# Altium PCB ESP-RC-Car.fixed.PcbDoc (part 2 of 2)
Units mm, origin at the board's own origin, x right, y up, seen from the top; angles counter-clockwise.
Board outline 100.25 x 60.25 mm, 4 copper layers (Top Layer, Int1 (Signal), Int2 (GND), Bottom Layer(PWR)), stack 1.586 mm thick; 110 components, 97 nets, 403 pads, 571 vias.
Unrouted connection lines stored in the file: 3.
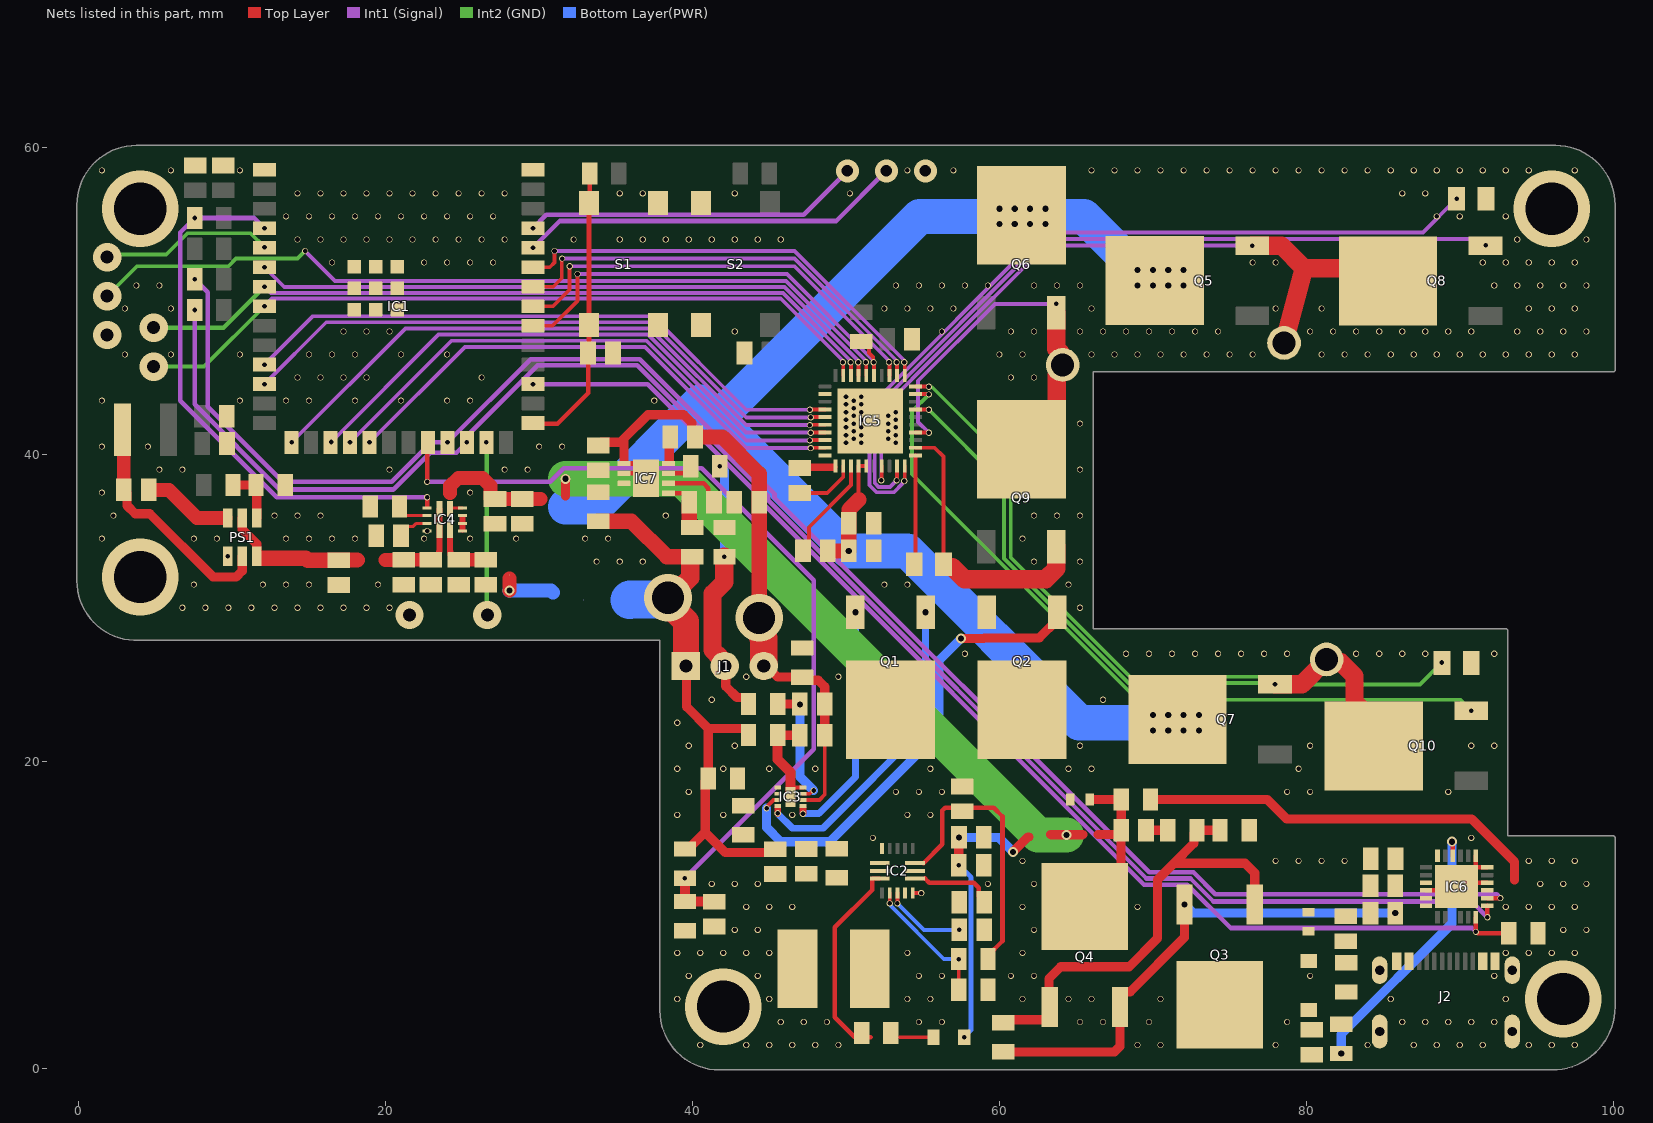
[diagram p4: the nets of this part, all layers, seen from the top]

## Via types
v1: diameter 0.4, hole 0.3, Top Layer to Bottom Layer(PWR), tented both sides, 500 vias
v2: diameter 0.65, hole 0.4, Top Layer to Bottom Layer(PWR), tented both sides, 49 vias
v3: diameter 1.85, hole 0.85, Top Layer to Bottom Layer(PWR), 9 vias
v4: diameter 5, hole 3.4, Top Layer to Bottom Layer(PWR), 5 vias
v5: diameter 1.5, hole 0.75, Top Layer to Bottom Layer(PWR), 4 vias
v6: diameter 3.1, hole 2.1, Top Layer to Bottom Layer(PWR), 2 vias
v7: diameter 0.65, hole 0.4, Top Layer to Bottom Layer(PWR), 1 vias
v8: diameter 0.4/0.4/0.4/0.4 (per signal layer), hole 0.3, Top Layer to Bottom Layer(PWR), tented both sides, 1 vias

## Nets (pads, with @x,y where several pads share a name; then routed paths per layer and width w, separated by ;. In a path a pad name is that pad's centre, name@x,y a point inside that pad or via, vN(x,y) a via of type N, cw(c..) or ccw(c..) an arc to the next point about the centre after c; other vN are vias at no path point) (continued)
GND: C1.2 C2.2 C3.1 C4.1 C6.1 C7.1 C8.1 C9.1 C10.2 C12.1 C13.1 C15.1 C16.1 C18.2 C20.2 C21.2 C22.1 C23.2 C24.2 C25.2 C26.2 C27.2 C28.2 C29.1 C30.1 C33.1 C34.1 C35.1 C36.1 D2.2 D3.2 IC1.1 IC1.40 IC1.41 IC1.42 IC1.43 IC1.44 IC1.45 IC1.46 IC1.47 IC1.48 IC1.49 IC2.8 IC2.16 IC4.3 IC4.4 IC4.5 IC4.12 IC5.10 IC5.11 IC5.20 IC5.32 IC5.40 IC5.41 IC6.10 IC6.12 IC6.13 IC6.22 IC6.25 J2.A1_B12 J2.B1_A12 J2.SH1 J2.SH2 J2.SH3 J2.SH4 PS1.1 Q2.3 R4.1 R5.1 R16.1 R24.1 R26.1 R27.1 R28.1 R29.1 R38.1 S1.2 S1.4 S2.1 S2.3 | length 113.1
  Top Layer w0.25: v1(53.8,38.259) 53.825,38.284 IC5.10@53.825,39.225 ; IC2.16@54.35,11.4 v1(54.9,11.4) ; R28.1@54.45,32.825 54.525,32.9 IC5.11@54.525,39.925 ; IC5.20@54.525,44.425 55.375,44.425 v1(55.4,44.4)
  Top Layer w0.3: IC6.22@87.8,11.575 89.55,11.575 IC6.25@89.8,11.825 ; IC6.25@90.05,12.075 IC6.10@91.8,12.075 ; IC6.13@91.05,13.825 91.05,13.075 IC6.12@91.8,13.075
  Top Layer w0.4: 25,35.1 IC4.4@25,35.5 IC4.5@25,35.9
  Int1 (Signal) w0.25: v1(53.8,38.259) 53.725,38.184 53.725,38.124 53.121,37.52 51.984,37.52 51.525,37.979 51.525,43.101 62.874,54.45 87.6,54.45 v1(89.8,56.65)
  Int2 (GND) w0.25: v1(55.4,44.4) 55.429,44.371 55.62,44.371 60.737,39.254 60.737,33.265 68.502,25.5 79.3,25.5 79.8,25 87.4,25 v1(88.825,26.425)
  other v1: 40.5,1.5 43.5,1.5 45,1.5 46.5,1.5 48,1.5 49.5,1.5 69,1.5 70.5,1.5 78,1.5 84,1.5 87,1.5 88.5,1.5 90,1.5 91.5,1.5 94.5,1.5 96,1.5 97.5,1.5 45.75,3 47.25,3 48.75,3 54.75,3 56.25,3 65.25,3 66.75,3 69.75,3 78.75,3 86.25,3 87.75,3 89.25,3 90.75,3 92.25,3 39,4.5 45,4.5 54,4.5 55.5,4.5 61.5,4.5 64.5,4.5 66,4.5 70.5,4.5 85.5,4.5 93,4.5 39.75,6 44.25,6 54.75,6 56.25,6 60.75,6 62.25,6 80.25,6 92.25,6 39,7.5 40.5,7.5 42,7.5 43.5,7.5 45,7.5 54,7.5 61.5,7.5 93,7.5 94.5,7.5 96,7.5 97.5,7.5 42.75,9 44.25,9 62.25,9 96.75,9 98.25,9 43.5,10.5 45,10.5 46.5,10.5 61.5,10.5 69,10.5 93,10.5 94.5,10.5 96,10.5 97.5,10.5 41.25,12 42.75,12 44.25,12 59.25,12 62.25,12 95.25,12 96.75,12 98.25,12 61.5,13.5 78,13.5 79.5,13.5 81,13.5 82.5,13.5 94.5,13.5 96,13.5 97.5,13.5 51.75,15 90.75,15 39,16.5 42,16.5 46.5,16.5 54,16.5 55.5,16.5 39.75,18 53.25,18 54.75,18 56.25,18 78.75,18 80.25,18 89.25,18 39,19.5 42,19.5 45,19.5 48,19.5 55.5,19.5 64.5,19.5 66,19.5 79.5,19.5 39.75,21 42.75,21 65.25,21 80.25,21 90.75,21 92.25,21 39,22.5 41.25,24 66.75,24 43.5,25.5 49.5,25.5 57.75,27 68.25,27 69.75,27 71.25,27 72.75,27 74.25,27 75.75,27 77.25,27 78.75,27 83.25,27 84.75,27 86.25,27 87.75,27 92.25,27 6.75,30 8.25,30 9.75,30 11.25,30 12.75,30 14.25,30 15.75,30 17.25,30 18.75,30 20.25,30 65.25,30 7.5,31.5 12,31.5 13.5,31.5 15,31.5 19.5,31.5 52.5,31.5 54,31.5 64.5,31.5 33.75,33 35.25,33 36.75,33 62.25,33 65.25,33 9.7,33.35 1.5,34.5 7.5,34.5 9,34.5 13.5,34.5 15,34.5 16.5,34.5 18,34.5 22.5,34.5 25.5,34.5 28.5,34.5 33,34.5 34.5,34.5 61.5,34.5 22.7,35 2.25,36 12.75,36 14.25,36 15.75,36 38.25,36 62.25,36 63.75,36 65.25,36 1.5,37.5 25.5,37.5 5.25,39 6.75,39 20.25,39 27.75,39 29.25,39 65.25,39 1.5,40.5 4.5,40.5 30,40.5 31.5,40.5 50,40.75 51,40.75 53.25,40.75 50.5,41 52.75,41 50,41.25 51,41.25 53.25,41.25 50.5,41.5 52.75,41.5 50,41.75 51,41.75 53.25,41.75 50.5,42 52.75,42 65.25,42 50,42.25 51,42.25 53.25,42.25 50.5,42.5 52.75,42.5 50,42.75 51,42.75 53.25,42.75 50.5,43 50,43.25 51,43.25 1.5,43.5 10.5,43.5 13.5,43.5 15,43.5 18,43.5 21,43.5 24,43.5 25.5,43.5 37.5,43.5 50.5,43.5 50,43.75 51,43.75 14.25,45 15.75,45 17.25,45 18.75,45 26.25,45 60.75,45 62.25,45 3,46.5 6,46.5 10.5,46.5 15,46.5 16.5,46.5 18,46.5 21,46.5 24,46.5 60,46.5 61.5,46.5 66,46.5 67.5,46.5 69,46.5 70.5,46.5 72,46.5 73.5,46.5 75,46.5 76.5,46.5 81,46.5 82.5,46.5 84,46.5 85.5,46.5 87,46.5 88.5,46.5 90,46.5 91.5,46.5 93,46.5 94.5,46.5 96,46.5 97.5,46.5 17.25,48 18.75,48 20.25,48 42.75,48 56.25,48 60.75,48 62.25,48 65.25,48 66.75,48 68.25,48 69.75,48 71.25,48 72.75,48 74.25,48 80.25,48 81.75,48 83.25,48 84.75,48 86.25,48 87.75,48 89.25,48 90.75,48 93.75,48 95.25,48 96.75,48 98.25,48 3,49.5 6,49.5 52.5,49.5 54,49.5 55.5,49.5 57,49.5 66,49.5 78,49.5 81,49.5 94.5,49.5 96,49.5 97.5,49.5 3.75,51 5.25,51 53.25,51 54.75,51 56.25,51 57.75,51 59.25,51 62.25,51 63.75,51 65.25,51 92.25,51 93.75,51 95.25,51 96.75,51 98.25,51 16.5,52.5 22.5,52.5 24,52.5 25.5,52.5 27,52.5 76.5,52.5 78,52.5 91.5,52.5 93,52.5 94.5,52.5 96,52.5 97.5,52.5 14.25,54 15.75,54 17.25,54 18.75,54 20.25,54 21.75,54 23.25,54 24.75,54 26.25,54 27.75,54 32.25,54 35.25,54 36.75,54 38.25,54 39.75,54 41.25,54 42.75,54 44.25,54 45.75,54 93.75,54 98.25,54 13.5,55.5 15,55.5 16.5,55.5 18,55.5 19.5,55.5 21,55.5 22.5,55.5 24,55.5 25.5,55.5 27,55.5 88.5,55.5 90,55.5 93,55.5 14.25,57 15.75,57 17.25,57 18.75,57 20.25,57 21.75,57 23.25,57 24.75,57 26.25,57 27.75,57 35.25,57 36.75,57 42.75,57 50.25,57 86.25,57 87.75,57 1.5,58.5 6,58.5 10.5,58.5 54,58.5 57,58.5 66,58.5 67.5,58.5 69,58.5 70.5,58.5 72,58.5 73.5,58.5 75,58.5 76.5,58.5 78,58.5 79.5,58.5 81,58.5 82.5,58.5 84,58.5 85.5,58.5 87,58.5 88.5,58.5 90,58.5 91.5,58.5 93,58.5 94.5,58.5 97.5,58.5
  other v3: 21.55,29.525 1.85,47.77
  other v4: 42,4 96.75,4.5 4,32 4,56 96,56
  other v5: 55.168,58.47
INHA: IC1.11 IC5.34 | length 40.4
  Top Layer w0.25: v1(47.65,42.9) 47.675,42.925 IC5.34@48.625,42.925
  Int1 (Signal) w0.25: v1(12.1,45.84) 15.26,49 37.4,49 43.5,42.9 v1(47.65,42.9)
INHB: IC1.15 IC5.36 | length 40.5
  Top Layer w0.25: v1(47.65,41.9) 47.675,41.925 IC5.36@48.625,41.925
  Int1 (Signal) w0.25: v1(13.865,40.78) 21.285,48.2 37.2,48.2 43.5,41.9 v1(47.65,41.9)
INHC: IC1.18 IC5.38 | length 36.4
  Top Layer w0.25: v1(47.65,40.903) 47.672,40.925 IC5.38@48.625,40.925
  Int1 (Signal) w0.25: v1(17.675,40.78) 24.295,47.4 37,47.4 43.5,40.9 47.647,40.9 v1(47.65,40.903)
INLA: IC1.12 IC5.35 | length 40.8
  Top Layer w0.25: v1(47.7,42.4) 47.725,42.425 IC5.35@48.625,42.425
  Int1 (Signal) w0.25: v1(12.1,44.57) 16.13,48.6 37.295,48.6 43.495,42.4 v1(47.7,42.4)
INLB: IC1.17 IC5.37 | length 37.7
  Top Layer w0.25: v1@47.7,41.425 IC5.37@48.625,41.425
  Int1 (Signal) w0.25: v1(16.449,40.8) 23.449,47.8 37.1,47.8 43.475,41.425 47.675,41.425 v1(47.7,41.4)
INLC: IC1.19 IC5.39 | length 35
  Top Layer w0.25: v1@47.7,40.425 IC5.39@48.625,40.425
  Int1 (Signal) w0.25: v1(18.945,40.78) 25.165,47 36.9,47 43.5,40.4 v1(47.7,40.4)
IO0: C6.2 IC1.27 R2.2 S1.1 S1.3 | length 18.8
  Top Layer w0.3: IC1.27@29.6,42.03 29.63,42 31.2,42 33.19,43.99 C6.2@33.19,46.6 33.25,46.66 S1.1@33.25,48.425 S1.3@33.25,56.375 33.3,56.425 R2.2@33.3,58.3
MISO_DRV: IC1.5 IC5.26 | length 65.9
  Top Layer w0.25: IC5.26@51.325,45.125 v1@51.325,46
  Int1 (Signal) w0.25: v1(14.75,53.25) 16.7,51.3 46.101,51.3 51.271,46.13 51.271,46.029 v1(51.3,46)
  Int2 (GND) w0.25: v3(1.85,50.31) 3.79,52.25 9.75,52.25 10.25,52.75 14.25,52.75 v1(14.75,53.25) ; v3(1.85,52.85) 2.025,53.025 5.7,53.025 7.075,54.4 11.2,54.4 v1(12.1,53.5)
MOSI_DRV: IC1.6 IC5.27 | length 42.2
  Top Layer w0.25: IC5.27@50.825,45.125 v1@50.825,46
  Int1 (Signal) w0.25: v1(12.1,52.19) 13.39,50.9 46.001,50.9 50.725,46.176 50.725,46.116 50.8,46.041 v1(50.8,46)
NetC5_1: C5.1 PS1.6 | length 5.8
  Top Layer w0.9: C5.1@4.55,37.7 4.577,37.673 5.877,37.673 7.7,35.85 PS1.6@9.55,35.85
NetC5_2: C5.2 L1.2 PS1.2 | length 15.7
  Top Layer w0.6: C5.2@2.89,37.74 3.14,37.49 3.14,36.66 3.675,36.125 4.625,36.125 8.75,32 10.25,32 10.65,32.4 PS1.2@10.65,33.35
  Top Layer w0.9: L1.2@2.85,41.6 2.93,41.52 C5.2@2.93,37.7
NetC7_2: C7.2 IC2.14 | length 5.4
  Top Layer w0.25: v1(53.35,10.725) IC2.14@53.35,11.4
  Bottom Layer(PWR) w0.25: v1(53.35,10.725) 55.075,9 v1(57.39,9)
NetC9_2: C9.2 IC2.3 R3.2 | length 18.6
  Top Layer w0.25: IC2.3@54.5,13.35 IC2.3@55.05,13.35
  Top Layer w0.3: IC2.3@55.05,13.35 56.283,14.583 56.283,16.782 56.458,16.958 57.342,16.958 C9.2@57.575,16.725 57.808,16.958 59.633,16.958 60.2,16.39 60.2,8.275 59.25,7.325 R3.2@59.25,7.1
NetC11_1: C11.1 IC2.1 | length 4.8
  Top Layer w0.3: IC2.1@55.15,12.35 55.435,12.065 58.335,12.065 58.64,11.76 58.64,11.16 C11.1@59,10.8
NetC11_2: C11.2 IC2.15 L2.2 | length 1.1
  Top Layer w0.25: L2.2@51.6,7.575 L2.2@51.6,8.675
NetC12_2: C12.2 C13.2 IC2.2 LED1.2 R30.2 | length 18.3
  Top Layer w0.6: v1(57.355,13.225) C13.2@57.355,14.415 ; v2(60.886,14.086) 61.863,15.062 61.912,15.062
  Bottom Layer(PWR) w0.3: v1(57.355,13.225) 58.15,12.43 58.15,2.477 57.7,2.027 v8(57.7,2)
  Bottom Layer(PWR) w0.6: v2(57.365,15.025) 59.948,15.025 v2(60.886,14.086)
NetC14_2: C14.2 IC3.8 IC3.9 R10.1 | length 6.7
  Top Layer w0.25: 46.375,18.475 46.575,18.275 IC3.8@47.2,18.275
  Top Layer w0.65: IC3.9@46.375,17.675 46.375,18.475 46.375,19.275 45.55,20.1 R10.1@45.55,21.7 45.562,21.688 46.977,21.688 C14.2@46.99,21.675
NetC17_2: C17.2 IC3.7 R13.1 | length 8.2
  Top Layer w0.25: IC3.7@47.2,17.875 47.633,17.875 47.846,18.088 v1(47.887,18.088)
  Top Layer w0.6: R13.1@45.55,23.725 C17.2@46.99,23.725
  Bottom Layer(PWR) w0.6: v2(47,23.7) 47,18.975 v1(47.887,18.088)
NetC19_1: C19.1 D3.1 Q4.2 R20.2 R33.2 | length 11.5
  Top Layer w0.6: Q4.2@65.563,10.525 67.93,12.892 C19.1@67.93,15.5 ; D3.1@66.075,17.5 R20.2@67.95,17.5 67.94,17.49 67.94,15.51 C19.1@67.93,15.5 ; R33.2@66.425,15.225 67.72,15.225 67.93,15.435 C19.1@67.93,15.5
NetC19_2: C19.2 R21.1 | length 1.4
  Top Layer w0.6: C19.2@69.55,15.5 R21.1@70.975,15.5
NetC20_1: C20.1 C21.1 IC4.6 IC4.7 R32.1 | length 8.4
  Top Layer w0.2: IC4.7@24.2,36.425 24.2,36.5 IC4.6@25,36.5
  Top Layer w0.9: 24.2,37.455 24.2,37.923 24.727,38.45 26.313,38.45 26.84,37.923 26.84,37.145 26.9,37.085 C21.1@27.125,37.085 ; C21.1@27.21,37.085 C20.1@28.9,37.085 30.09,37.085 30.1,37.075
NetC22_2: C22.2 IC6.24 Q3.3 Q4.3 R19.2 | length 32.2
  Top Layer w0.6: R19.2@60.25,1.05 67.499,1.05 67.85,1.401 Q4.3@67.85,3.975 ; Q4.3@67.85,4.745 68.08,4.975 68.525,4.975 72.064,8.514 v2(72.064,10.66)
  Bottom Layer(PWR) w0.6: v2(72.064,10.66) 72.078,10.66 72.638,10.1 v2(85.8,10.1)
NetC23_1: C23.1 C24.1 IC4.1 IC4.8 R34.2 | length 6.4
  Top Layer w0.4: C24.1@23.175,33.12 23.485,33.43 23.485,33.646 23.503,33.664 23.503,34.747 23.5,34.75 IC4.1@23.5,35.072 ; IC4.1@23.5,35.075 IC4.8@23.5,36.425
  Top Layer w0.9: 19.975,33.1 21.155,33.1 C23.1@21.175,33.12 C24.1@22.95,33.12
NetC25_1: C25.1 D1.1 R18.1 R22.2
NetC26_1: C26.1 IC6.23
NetC27_1: C27.1 C28.1 IC4.2 R35.2 | length 4.1
  Top Layer w0.4: IC4.2@24.2,35.075 24.2,33.67 24.215,33.655 24.215,33.43 24.525,33.12 24.725,33.12 C27.1@24.75,33.12
  Top Layer w0.9: C27.1@24.75,33.12 26.5,33.12 C28.1@26.505,33.125
NetC29_2: C29.2 IC6.21
NetC30_2: C30.2 IC4.11 | length 2.1
  Top Layer w0.2: C30.2@21,34.7 21,34.89 21.41,35.3 21.8,35.3 22,35.5 IC4.11@22.7,35.5
NetC31_1: C31.1 IC5.2 | length 4
  Top Layer w0.25: C31.1@47,37.48 48.78,37.48 49.825,38.525 IC5.2@49.825,39.225
NetC31_2: C31.2 IC5.1 | length 2.2
  Top Layer w0.5: C31.2@47,39.1 47.062,39.162 IC5.1@49.2,39.162
NetC32_2: C32.2 IC5.3 | length 6.8
  Top Layer w0.25: C32.2@47.2,33.7 47.585,34.085 47.585,35.247 50.325,37.987 IC5.3@50.325,39.225
NetC36_2: C36.2 IC1.22 R37.1 R38.2 | length 57.5
  Top Layer w0.3: v1@22.7,38.227 22.7,40.725 IC1.22@22.755,40.78
  Top Layer w0.65: v1(39.5,12.375) R38.2@39.5,10.85 39.502,10.848 41.397,10.848 C36.2@41.4,10.845
  Int1 (Signal) w0.3: v1(22.7,38.2) 30.712,38.2 31.612,39.1 40.6,39.1 47.9,31.8 47.9,20.775 v1(39.5,12.375)
NetC37_1: C37.1 C38.2 IC7.2 R41.1 | length 3.8
  Top Layer w0.3: IC7.2@38.425,38.1 40.725,38.1 41.035,37.79 41.035,37.235 C37.1@41.395,36.875
NetC37_2: C37.2 IC7.1 R39.1 | length 3.6
  Top Layer w0.3: IC7.1@38.425,37.45 39.415,37.45 39.775,37.09 C37.2@39.775,36.875
  Top Layer w1: C37.2@39.775,36.875 39.785,36.865 39.785,35.225 R39.1@39.975,35.225
NetC39_2: C39.2 IC7.4 | length 1.6
  Top Layer w0.6: IC7.4@38.483,39.525 38.483,41.068 C39.2@38.54,41.125
NetC40_2: C40.2 IC7.7 R40.2
NetIC2_10: IC2.10 L2.1 R6.1
NetIC2_11: IC2.11 R8.1 | length 13.4
  Top Layer w0.25: IC2.11@51.725,12.35 IC2.11@52.2,12.35
  Top Layer w0.3: 51.6,2 50.575,2 49.275,3.3 49.275,9.175 51.7,11.6 51.7,12.174 IC2.11@51.7,12.325
NetIC2_13: IC2.13 R3.1 R4.2 | length 8.7
  Top Layer w0.25: v1(52.85,10.725) IC2.13@52.85,11.4 ; R4.2@57.35,5.1 v1(57.35,7.1)
  Bottom Layer(PWR) w0.25: v1(52.85,10.725) 52.85,10.684 52.925,10.609 52.925,10.549 56.374,7.1 v1(57.35,7.1)
NetIC3_1: IC3.1 R12.1
NetIC3_2: IC3.2 R16.2
NetIC3_3: IC3.3 Q2.1 | length 30.8
  Top Layer w0.25: v1(44.825,16.925) 44.854,16.954 44.854,17.047 45.282,17.475 IC3.3@45.55,17.475
  Top Layer w0.6: v2(57.486,27.986) 58.966,27.986 59.011,28.032 62.597,28.032 63.765,29.2 Q2.1@63.765,29.7
  Bottom Layer(PWR) w0.6: v1(44.825,16.925) 44.825,15.675 45.75,14.75 48.95,14.75 56.05,21.85 56.05,26.55 v2(57.486,27.986)
NetIC3_4: IC3.4 Q1.1 | length 20.5
  Top Layer w0.45: v1(45.55,16.6) 45.55,16.95
  Bottom Layer(PWR) w0.45: v1(45.55,16.6) 46.525,15.625 48.5,15.625 55.19,22.315 v2(55.19,29.7)
NetIC3_5: IC3.5 Q1.3 R17.1 | length 15.5
  Top Layer w0.45: v1(47.2,16.575) 47.2,16.95
  Bottom Layer(PWR) w0.45: v1(47.2,16.575) 48.225,16.575 50.61,18.96 v2(50.61,29.7)
NetIC4_10: IC4.10 R24.2 | length 2.2
  Top Layer w0.2: R24.2@20.9,36.6 20.9,36.4 21.3,36 IC4.10@22.7,36
NetIC6_9: IC6.9 R20.1 | length 26.6
  Top Layer w0.6: R20.1@69.85,17.5 77.45,17.5 78.725,16.225 90.775,16.225 93.575,13.425 93.575,12.252
NetIC6_16: IC6.16 R23.1 | length 17.7
  Top Layer w0.3: v2(89.5,14.75) 89.55,14.7 IC6.16@89.55,13.825
  Bottom Layer(PWR) w0.6: v7(82.275,0.95) 82.275,2.197 89.5,9.422 v2(89.5,14.75)
NetIC6_18: IC6.18 R22.1
NetIC7_3: IC7.3 R42.1 | length 1.7
  Top Layer w0.3: IC7.3@38.425,38.75 39.525,38.75 39.875,39.1 R42.1@39.875,39.225
NetLED1_1: LED1.1 R8.2 | length 2.2
  Top Layer w0.25: 53.5,2 LED1.1@55.7,2
NetPS1_4: PS1.4 R1.1 R5.2 | length 3.7
  Top Layer w0.6: R1.1@10.05,38 R5.2@11.55,38 11.6,37.95 PS1.4@11.6,35.85
NetQ1_2: Q1.2 Q2.2
NetQ3_1: Q3.1 Q4.1 R19.1 R21.2 R23.2 | length 31
  Top Layer w0.6: R19.1@60.25,2.95 60.45,3.15 63.048,3.15 63.278,3.38 Q4.1@63.278,3.975 63.224,4.029 63.224,5.824 64,6.6 68.45,6.6 70.3,8.45 70.3,12.275 71.375,13.35 ; R23.2@74.375,15.5 73.1,15.5 R21.2@72.875,15.5 72.675,15.3 72.675,14.65 71.375,13.35 ; Q3.1@76.636,10.66 76.636,12.714 76,13.35 71.375,13.35
NFAULT: IC1.32 IC5.25 R25.1 | length 29.7
  Top Layer w0.25: IC1.32@29.6,48.38 30.88,48.38 32.5,50 v1(32.5,51.75) ; R25.1@51,47.35 51.125,47.35 51.5,46.975 51.5,46.6 51.771,46.329 51.771,46.029 v1(51.8,46) ; IC5.25@51.825,45.125 v1@51.825,46
  Int1 (Signal) w0.25: v1(32.5,51.75) 46.151,51.75 51.771,46.13 51.771,46.029 v1(51.8,46)
PWM_Servo: IC1.25 | length 11.3
  Int2 (GND) w0.3: v1(26.565,40.78) 26.584,40.761 26.584,29.571 v3(26.63,29.525)
RESET: IC1.29 IC6.6 R26.2 | length 79.5
  Top Layer w0.3: IC6.6@91.05,9.825 v1(91.05,8.875) 91.077,8.875 91.177,8.775 R26.2@93.2,8.775
  Int1 (Signal) w0.3: v1(29.6,44.57) 37.066,44.57 44.541,37.096 44.541,36.829 69.42,11.95 72.25,11.95 75.075,9.125 90.8,9.125 v1(91.05,8.875)
RXD: IC1.36 | length 25.1
  Int1 (Signal) w0.3: v1(29.6,53.46) 31.34,55.2 49.358,55.2 v5(52.628,58.47)
SCL: IC1.24 IC6.7 R9.2 | length 112.1
  Top Layer w0.3: v1(91.8,9.825) IC6.7@91.8,10.575
  Int1 (Signal) w0.3: v1(7.55,49.4) 7.55,43.25 13.1,37.7 20.5,37.7 22.9,40.1 24.615,40.1 25.314,40.799 25.314,41.214 29.9,45.8 36.402,45.8 44.941,37.261 44.941,36.995 69.585,12.35 72.45,12.35 73.95,10.85 90.775,10.85 v1(91.8,9.825)
  other v1: 25.295,40.78
SCLK: IC1.7 IC5.28 | length 49.5
  Top Layer w0.25: IC5.28@50.325,45.125 v1@50.325,46
  Int1 (Signal) w0.25: v1(12.1,50.92) 12.52,50.5 45.901,50.5 50.271,46.13 50.271,46.029 v1(50.3,46)
  Int2 (GND) w0.3: v3(4.875,48.25) 9.43,48.25 v1(12.1,50.92)
SDA: IC1.23 IC6.8 R11.2 | length 113.8
  Top Layer w0.3: IC6.8@91.8,11.075 v1(92.65,11.075)
  Int1 (Signal) w0.3: v1(7.55,51.4) 8.4,50.55 8.4,43.1 13.3,38.2 20.4,38.2 22.98,40.78 v1(24.025,40.78) 29.445,46.2 36.568,46.2 45.341,37.427 45.341,37.161 69.751,12.75 72.65,12.75 74.075,11.325 92.4,11.325 v1(92.65,11.075)
SHA: IC5.7 pad.6@78.55,47.254 Q5.3 Q8.2 | length 49
  Top Layer w0.25: v1@52.325,38.3 IC5.7@52.325,39.225
  Top Layer w1.2: v1(76.475,53.6) 78.375,53.6 79.85,52.125 ; pad.6@78.55,47.254 79.85,52.125 ; Q8.2@85.325,51.3 84.5,52.125 79.85,52.125
  Int1 (Signal) w0.25: v1(52.3,38.3) 52.3,42.886 56.299,46.885 63.014,53.6 v1(76.475,53.6)
SHB: IC5.14 pad.6@64.125,45.825 Q6.3 Q9.2 | length 26.2
  Top Layer w0.25: IC5.14@54.525,41.425 55.375,41.425 v1(55.4,41.4)
  Top Layer w1.2: Q9.2@61.425,40.325 63.725,42.625 63.725,45.154 64.529,45.958 pad.6@64.529,46.074 ; Q6.3@63.715,49.225 63.715,46.888 63.934,46.67 63.934,46.016 pad.6@64.125,45.825
  Int1 (Signal) w0.25: v1(55.4,41.4) 54.7,42.1 54.7,44.791 59.709,49.8 v1(63.7,49.8)
SHC: IC5.17 pad.6@81.325,26.625 Q7.3 Q10.2 | length 46.2
  Top Layer w0.25: IC5.17@54.525,42.925 55.375,42.925 v1(55.4,42.9)
  Top Layer w1.2: v1(77.96,25.015) 79.715,25.015 pad.6@81.325,26.625 ; pad.6@81.516,26.434 82.251,26.434 83.14,25.545 83.14,23.863 83.843,23.16 84.475,23.16 Q10.2@86.775,20.86
  Int2 (GND) w0.25: v1(55.4,42.9) 60.3,38 60.3,33.207 68.417,25.09 77.844,25.09 77.919,25.015 v1(77.96,25.015)
SOA: IC1.33 IC5.23 | length 28.7
  Top Layer w0.25: IC1.33@29.6,49.65 30.9,49.65 31.971,50.721 31.971,52.221 v1(32,52.25) ; IC5.23@52.825,45.125 v1@52.825,46
  Int1 (Signal) w0.25: v1(32,52.25) 46.651,52.25 52.771,46.13 52.771,46.029 v1(52.8,46)
SOB: IC1.34 IC5.22 | length 28.9
  Top Layer w0.25: IC1.34@29.6,50.92 30.92,50.92 31.471,51.471 31.471,52.721 v1(31.5,52.75) ; IC5.22@53.325,45.125 v1@53.325,46
  Int1 (Signal) w0.25: v1(31.5,52.75) 46.651,52.75 53.271,46.13 53.271,46.029 v1(53.3,46)
SOC: IC1.35 IC5.21 | length 29
  Top Layer w0.25: IC1.35@29.6,52.19 30.69,52.19 31,52.5 v1(31,53.25) ; v1(53.8,46) 53.825,45.975 IC5.21@53.825,45.125
  Int1 (Signal) w0.25: v1(31,53.25) 46.651,53.25 53.771,46.13 53.771,46.029 v1(53.8,46)
SPA: IC5.9 Q8.3 R27.2 | length 52.1
  Top Layer w0.25: v1(53.3,38.3) 53.325,38.325 IC5.9@53.325,39.225
  Int1 (Signal) w0.25: v1(53.3,38.3) 52.875,37.875 52.124,37.875 51.875,38.124 51.875,42.956 62.944,54.025 91.29,54.025 v1(91.7,53.615)
SPB: IC5.12 Q9.3 R28.2 | length 18.5
  Top Layer w0.25: IC5.12@54.525,40.425 55.775,40.425 56.35,39.85 R28.2@56.35,32.825
  Top Layer w1.2: R28.2@56.4,32.65 56.925,32.65 57.725,31.85 63.012,31.85 63.715,32.553 Q9.3@63.715,33.975 Q9.3@63.715,34
SPC: IC5.19 Q10.3 R29.2 | length 49.4
  Top Layer w0.25: IC5.19@54.525,43.925 55.375,43.925 v1(55.4,43.9)
  Int2 (GND) w0.25: v1(55.4,43.9) 54.3,42.8 54.3,38.7 69,24 90.04,24 v1(90.75,23.29)
SS: IC1.8 IC5.29 | length 49.4
  Top Layer w0.25: IC5.29@49.825,45.125 v1@49.825,46
  Int1 (Signal) w0.25: v1(12.1,49.65) 12.6,50.15 45.751,50.15 49.725,46.176 49.725,46.116 49.8,46.041 v1(49.8,46)
  Int2 (GND) w0.25: v3(4.875,45.71) 8.16,45.71 v1(12.1,49.65)
ST: IC1.4 IC4.9 R15.1 | length 36.4
  Top Layer w0.3: 22.7,36.6 v1(22.7,37.2)
  Int1 (Signal) w0.3: v1(12.1,54.73) 11.43,55.4 v1(7.55,55.4) 6.6,54.45 6.6,43.5 12.9,37.2 v1(22.7,37.2)
TXD: IC1.37 | length 22
  Int1 (Signal) w0.3: v1(29.6,54.73) 30.47,55.6 47.24,55.6 v5@50.04,58.4
  other v5: 50.088,58.47
VBAT+: C15.2 C16.2 IC2.9 J1.1 R6.2 R10.2 R12.2 R31.1 R37.2 R39.2 R40.1 | length 39.5
  Top Layer w0.6: R37.2@39.5,14.275 39.725,14.275 40.8,15.35 40.825,15.35 ; J1.1@39.61,26.8 39.61,23.54 41.025,22.125 ; R10.2@43.65,21.7 43.65,21.925 43.45,22.125 43.225,22.125 41.025,22.125 ; C15.2@45.4,14.26 45.19,14.05 42.125,14.05 40.825,15.35 ; 40.825,15.35 40.825,18.675 R12.2@41.025,18.875 41.025,22.125
  Top Layer w1: R40.1@33.85,35.625 36.025,35.625 38.325,33.325 R39.2@39.975,33.325
  Top Layer w1.2: v6@39.1,30.7 39.1,31.214 39.85,31.964 R39.2@39.85,33.225
  Top Layer w1.7: v6@39.047,30.7 38.668,30.321 38.668,30.003 39.56,29.111 J1.1@39.56,26.2
  Bottom Layer(PWR) w2.5: R31.1@35.9,30.5 35.935,30.535 36.9,30.535 38.285,30.535 v6(38.4,30.65)
VBAT-: C14.1 C17.1 C38.1 C39.1 C40.1 IC3.6 IC7.5 IC7.6 IC7.9 J1.3 R17.2 | length 44
  Top Layer w0.25: IC3.6@47.2,17.475 48.275,17.475 48.61,17.81 C14.1@48.61,21.675
  Top Layer w0.3: IC7.6@35.525,38.75 36.65,38.75 IC7.9@36.975,38.425 36.975,38.7 36.275,39.4 IC7.5@35.525,39.4
  Top Layer w0.6: C40.1@33.85,40.57 34.06,40.78 35.305,40.78 35.525,41 ; 35.525,39.625 35.525,40.78 35.525,41 ; C39.1@40.16,41.125 39.95,41.335 39.95,42.05 39.425,42.575 37.1,42.575 35.525,41 ; J1.3@44.64,26.2 J1.3@44.929,26.2 ; J1.3@44.929,26.099 45.554,25.475 R17.2@47.15,25.475 47.35,25.275 48.185,25.275 48.61,24.85 C17.1@48.61,23.725 C14.1@48.61,21.675
  Top Layer w1: C39.1@40.16,41.125 41.949,41.125 44.345,38.729 C38.1@44.345,36.875 44.335,36.865 v6(44.335,29.335)
  Top Layer w1.8: v6(44.335,29.335) 44.584,29.086 44.584,28.064 44.63,28.018 44.63,26.223 J1.3@44.637,26.216
VBATJ: R31.2 R35.1 R36.1 | length 3.7
  Top Layer w0.9: v2(28.075,31.125) 28.075,31.9
  Bottom Layer(PWR) w0.9: v2(28.075,31.125) 30.775,31.125 30.9,31
VBATM: J1.2 R13.2 R41.2 R42.2 | length 17.2
  Top Layer w0.6: J1.2@42.1,26.2 42.165,26.135 42.165,24.885 42.9,24.15 43.45,24.15 43.65,23.95 R13.2@43.65,23.725
  Top Layer w1.2: v1(42.075,33.325) 42.075,31.675 41.3,30.9 41.3,27.244 41.775,26.769 41.775,26.701 42.1,26.376 J1.2@42.1,26.2
  Bottom Layer(PWR) w0.6: v1(41.775,39.225) 42.075,38.925 v1(42.075,33.325)
VBUS: C18.1 D1.2 D2.1 J2.A4_B9 J2.B4_A9 Q3.2 R18.2
VDRAIN: C32.1 C33.2 C34.2 IC5.4 IC5.5 Q5.2 Q6.2 Q7.2 R36.2 | length 90.2
  Top Layer w0.25: 50.825,37.025 IC5.4@50.825,39.225 IC5.5@51.325,39.225
  Top Layer w1: C32.1@48.82,33.7 v2(50.18,33.7) 50.18,35.49 50.2,35.51 50.2,36.4 50.825,37.025
  Bottom Layer(PWR) w2.3: 31.725,36.575 33.675,36.575 40.49,43.39 41.59,42.29 ; 59.5,55.5 54.8,55.5 41.59,42.29 ; 62,55.5 65.5,55.5 v2(69,52) ; 71,22.5 65.2,22.5 54,33.7 v2(50.18,33.7) 41.59,42.29
  other v2: 70,22 71,22 72,22 73,22 70,23 71,23 72,23 73,23 69,51 70,51 71,51 72,51 70,52 71,52 72,52 60,55 61,55 62,55 63,55 60,56 61,56 62,56 63,56
VMCU: C8.2 PS1.3 PS1.5 R34.1 | length 9.1
  Top Layer w0.6: PS1.5@10.65,35.85 10.65,35.1 11.6,34.15 PS1.3@11.6,33.45
  Top Layer w1: 11.9,33.215 14.79,33.215 14.91,33.095 C8.2@16.95,33.095 16.96,33.105 18.15,33.105
VSYS: R30.1 R32.2 R33.1 | length 45.5
  Top Layer w0.6: 31.724,37.274 v2(31.725,38.4) ; R30.1@63.35,15.225 63.378,15.197 64.353,15.197 v2(64.363,15.188) ; v2@64.363,15.211 64.376,15.197 65.397,15.197 R33.1@65.425,15.225
  Int2 (GND) w2.3: v2(31.725,38.4) 39.3,38.4 62.512,15.188 v2(64.363,15.188)
pads on no net: IC1.16 IC1.21 IC1.26 IC1.30 IC1.31 IC1.38 IC1.39 IC2.4 IC2.5 IC2.7 IC2.12 IC6.3 IC6.11 IC6.14 IC6.15 IC6.17 IC6.20 IC7.8 J2.A8 J2.B8

## Polygon pours and split planes (outlines as drawn)
no net on Mechanical 16 "NONET_L01_P000" (solid): 66,45.5 66,28.5 93,28.5 93,45.5
no net on Mechanical 16 "NONET_L-01_P-001" (solid): 0,0 0,25 35,25 35,0
no net on Mechanical 16 "NONET_L-01_P-001" (solid): 93,45 93,15 100,15 100,45
GND on Top Layer "GND_L01_P038" (solid, remove dead copper, pour order 38): 0,60 101,60 101,0 38,0 38,28 0,28
3V3 on Top Layer "3V3_L01_P037" (solid, pour order 37): 5.3,43.3 6.5,43.3 7.425,43.225 8.55,43.225 8.55,39.975 7.425,39.975 6.5,39.9 5.3,39.9
NetC27_1 on Top Layer "NETC27_1_L01_P036" (solid, pour order 36): 25.775,32.6 25.775,33.65 28.575,33.65 28.575,32.975 28.55,32.95 27.975,32.95 27.575,32.6 27.475,32.6
NetC20_1 on Top Layer "NETC20_1_L01_P035" (solid, pour order 35): 24,37.45 24.4,37.45 24.4,36.675 24,36.675
NetIC6_9 on Top Layer "NETIC6_9_L01_P013" (solid, pour order 13): 91.4,11.725 92.3,11.725 93.275,12.45 93.875,12.45 93.875,12.025 92.3,11.425 91.4,11.425
NetC40_2 on Top Layer "NETC40_2_L01_P033" (solid, pour order 33): 33.125,37.025 34.675,37.025 35,37.925 35.95,37.925 35.95,38.275 35,38.275 34.675,39.475 33.125,39.475
NetC37_1 on Top Layer "NETC37_1_L01_P032" (solid, pour order 32): 41.35,34.725 41.35,35.825 40.875,36.05 40.875,37.625 43.25,37.625 43.25,36.05 42.8,35.825 42.8,34.725
NetQ1_2 on Top Layer "NONET_L-01_P-001" (solid, pour order 21): 50,26.55 64.375,26.55 64.375,20.15 50,20.15
SPC on Top Layer "SPC_L01_P031" (solid, pour order 31): 90.2,27.175 90.2,25.519 89.65,24 89.65,22.675 91.85,22.675 91.85,24 91.3,25.519 91.3,27.175
NetC12_2 on Top Layer "NETC12_2_L01_P020" (solid, pour order 20): 53.85,12.975 55.25,12.975 56.712,13.95 57.875,13.95 57.875,12.475 56.75,12.475 55.25,12.725 53.85,12.725
VBAT+ on Top Layer "VBAT+_L01_P014" (solid, pour order 14): 52.85,13.225 51.45,13.225 50.125,13.8 48.575,13.8 48.225,13.75 44.65,13.75 44.65,14.8 48.575,14.8 50.225,14.8 51.45,13.475 52.85,13.475
SPA on Top Layer "SPA_L01_P030" (solid, pour order 30): 91.15,57.425 92.25,57.425 92.25,55.775 92.775,54.3 92.775,53 90.575,53 90.575,54.3 91.15,55.775
NetIC3_2 on Top Layer "NONET_L-01_P-001" (solid, pour order 26): 45.775,17.75 45,17.75 44.125,16.6 42.575,16.6 42.575,17.6 44.125,17.6 44.3,18 45.775,18
NetIC3_1 on Top Layer "NONET_L-01_P-001" (solid, pour order 25): 45.775,18.15 42.425,18.15 42.425,19.6 43.525,19.6 45.225,18.4 45.775,18.4
NetIC3_5 on Top Layer "NONET_L-01_P-001" (solid, pour order 23): 51.3,28.6 49.9,28.6 47.975,26.875 46.425,26.875 46.425,28 46.423,28.002 49.9,30.8 51.3,30.8
NetC11_2 on Top Layer "NETC11_2_L01_P019" (solid, pour order 19): 53.725,10.425 56.775,11.55 57.9,11.55 57.9,10.05 56.775,10.05 52.55,8.65 52.675,9.7
NetC11_2 on Top Layer "NETC11_2_L01_P018" (solid, pour order 18): 53.725,11.75 53.725,10.425 50.25,9.025 50.25,7.725 52.85,7.725 52.85,9.125 53.975,10.175 53.975,11.75
NetIC2_10 on Top Layer "NETIC2_10_L01_P017" (solid, pour order 17): 48.675,12.9 48.675,11.8 45.55,9.125 45.55,7.2 48.15,7.2 48.15,9.125 50.225,11.8 50.225,12.9
NetIC2_10 on Top Layer "NETIC2_10_L01_P016" (solid, pour order 16): 52.85,12.975 51.45,12.975 50.225,12.9 48.675,12.9 48.675,11.9 50.225,11.9 51.45,12.725 52.85,12.725
NetIC6_18 on Top Layer "NETIC6_18_L01_P010" (solid, pour order 10): 88.4,13.425 88.4,14.325 87.9,14.8 75.775,14.8 75.775,15.375 88.3,15.375 88.7,14.325 88.7,13.425
VBUS on Top Layer "VBUS_L01_P008" (solid, pour order 8): 87,6.275 87,8.375 86.6,8.775 86.35,8.775 81.725,8.775 81.325,9.175 79.65,9.175 71.525,7.075 75.45,8.15 71.525,7.075 71.525,1.25 77.2,1.25 77.2,7.075 77.203,7.072 77.203,7.078 77.2,7.069 77.2,4.175 79.525,6.5 80.825,6.5 81.775,6.35 83.425,6.35 84.35,7.825 83.975,7.825 84.725,7.825 85.075,7.825 86.186,7.825 86.4,7.625 86.4,6.275
NetC25_1 on Top Layer "NETC25_1_L01_P007" (solid, pour order 7): 79.6,1.975 79.6,4.25 79.6,4.35 81.875,5.45 83.325,5.45 83.325,4.35 83,3.45 83,2.35 81.45,2.35 81.2,1.975
NetC29_2 on Top Layer "NETC29_2_L01_P005" (solid, pour order 5): 88.2,11.925 87.322,11.925 86.425,12.9 85.3,12.9 85.3,14.375 86.425,14.375 87.3,12.225 88.2,12.225
NetC26_1 on Top Layer "NETC26_1_L01_P004" (solid, pour order 4): 88.2,10.925 87.3,10.925 86.425,11.125 85.3,11.125 85.3,12.625 86.4,12.625 87.3,11.225 88.2,11.225
NetC22_2 on Top Layer "NETC22_2_L01_P003" (solid, pour order 3): 88.2,10.725 87.3,10.725 86.425,10.85 85.3,10.85 85.3,9.35 86.425,9.35 87.3,10.425 88.2,10.425
VBUS on Top Layer "VBUS_L01_P000" (solid, pour order 0): 91.2,7.525 91.2,6.275 90.2,5.275 88,5.275 87,6.275 87,7.525 86.4,7.525 86.4,6.275 86.4,3.95 91.8,3.95 91.8,6.275 91.8,7.525
VDRAIN on Bottom Layer(PWR) "VDRAIN_L04_P042" (solid, pour order 42): 69,24 74,24 74,21 69,21
VDRAIN on Bottom Layer(PWR) "VDRAIN_L04_P041" (solid, pour order 41): 59,57 64,57 64,54 59,54
VDRAIN on Bottom Layer(PWR) "VDRAIN_L04_P040" (solid, pour order 40): 68,50 68,53 73,53 73,50
VBATJ on Bottom Layer(PWR) "VBATJ_L04_P034" (solid, pour order 34): 33.675,29.05 33.675,32.05 32.6,32.05 32.6,33.425 29.625,33.425 29.6,33.45 29.6,29.026
GND on Int2 (GND) "GND_L03_P039" (solid, remove dead copper, pour order 39): 0,60 101,60 101,0 38,0 38,28 0,28

## Keep-outs
Keep-Out Layer:
  lines w0.254: 3.623,28 38,28 38,3.75 ccw(c41.75,3.75) 41.75,0 96,0 ccw(c96,4) 100,4 100,5 ; 3.623,28.002 cw(c3.75,31.75) 0,31.75 0,56.25 cw(c3.75,56.25) 3.75,60 96.25,60 cw(c96.25,56.25) 100,56.25 100,54.25 100,45.5 93,45.5 66,45.5 66,28.5 93,28.5 93,15 100,15 100,5.67 100,5 ; 100,5 100,5

## Other copper
Top Layer:
  pour cut-out: 53.036,39.85 54.3,39.85 54.3,37.875 53.061,37.875
  pour cut-out: 53.9,44.25 53.9,44.675 55.1,44.675 55.275,44.8 55.825,44.8 55.825,44.438 55.725,44.25
  pour cut-out: 54.2,39.8 54.4,40 54.8,40 54.8,33.3 54.2,33.3
  pour cut-out: 53.95,40.15 55.1,40.15 55.1,39.65 53.95,39.65

## Silkscreen, mask and mechanical layers (free items; w line width, h text height)
Top Overlay:
  text "3V3" at 46.8,56.711 h1
  text "GND" at 54.2,56.711 h1
  text "TXD" at 49.3,56.7 h1
  text "RXD" at 51.8,56.7 h1
  text "MOSI" at 2.875,52.006 h0.5
  text "MISO" at 2.875,49.331 h0.5
  text "IO0" at 35,48.011 h1
  text "EN" at 42,48 h1
  text "SCLK" at 5.95,47.331 h0.5
  text "GND" at 2.825,46.906 h0.5
  text "SS" at 5.875,44.756 h0.5
  text "3V3" at 2.75,44.181 h0.5
  text "GND" at 20,28.406 h0.5
  text "3V3" at 22.8,28.306 h0.5
  text "PWM" at 25.1,28.3 h0.5